# Altium PCB Powerre.PcbDoc
Units mm, origin at the board's own origin, x right, y up, seen from the top; angles counter-clockwise.
Board outline 75.82 x 74.68 mm, 2 copper layers (Top Layer, Bottom Layer); 2 components, 6 nets, 12 pads, 0 vias.
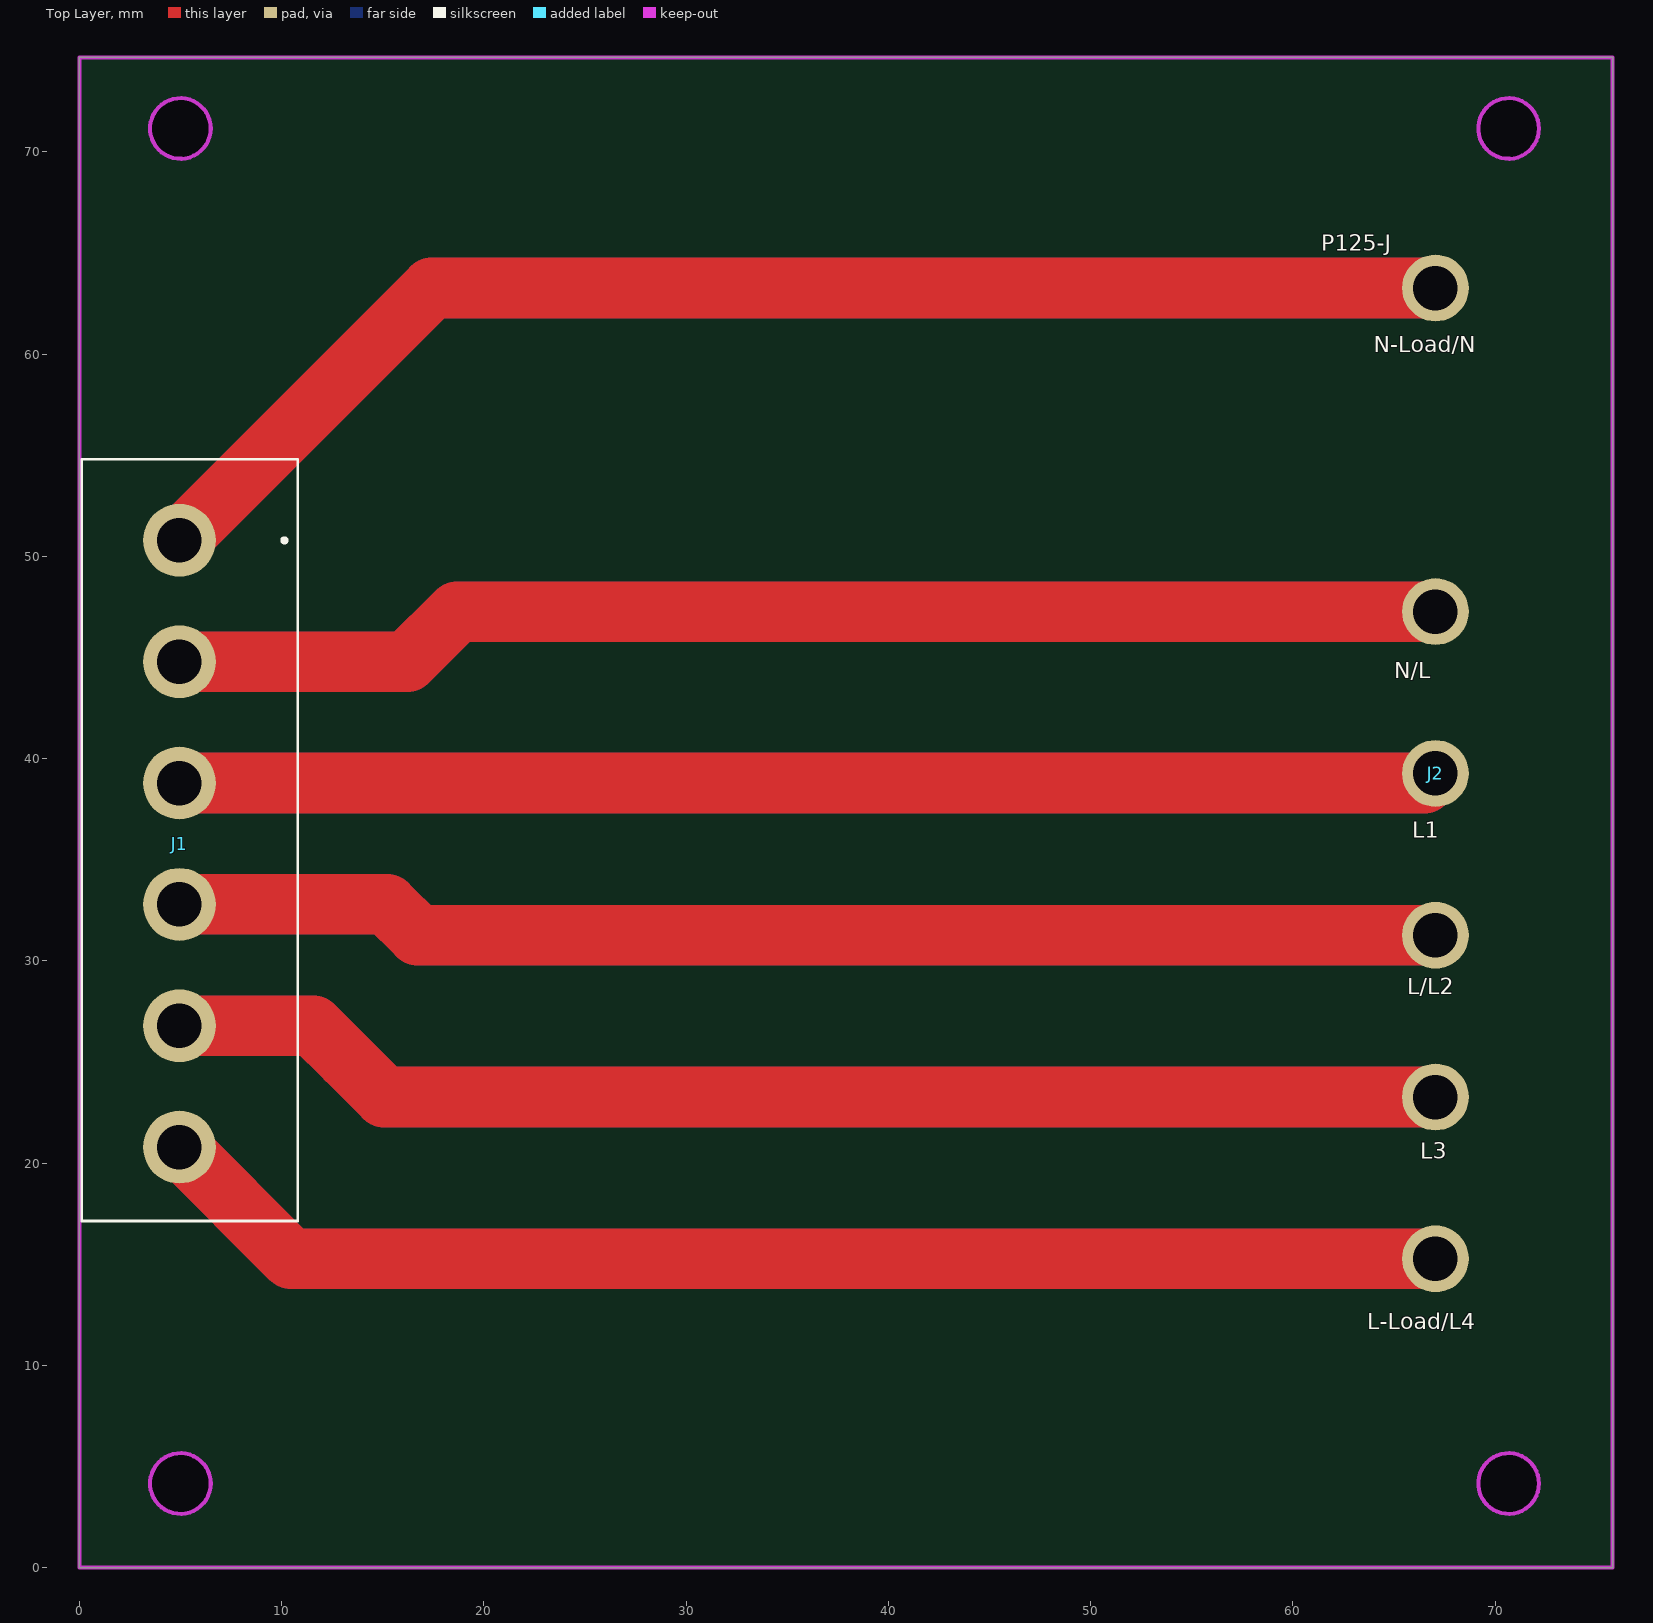
[diagram p0: Top Layer view]
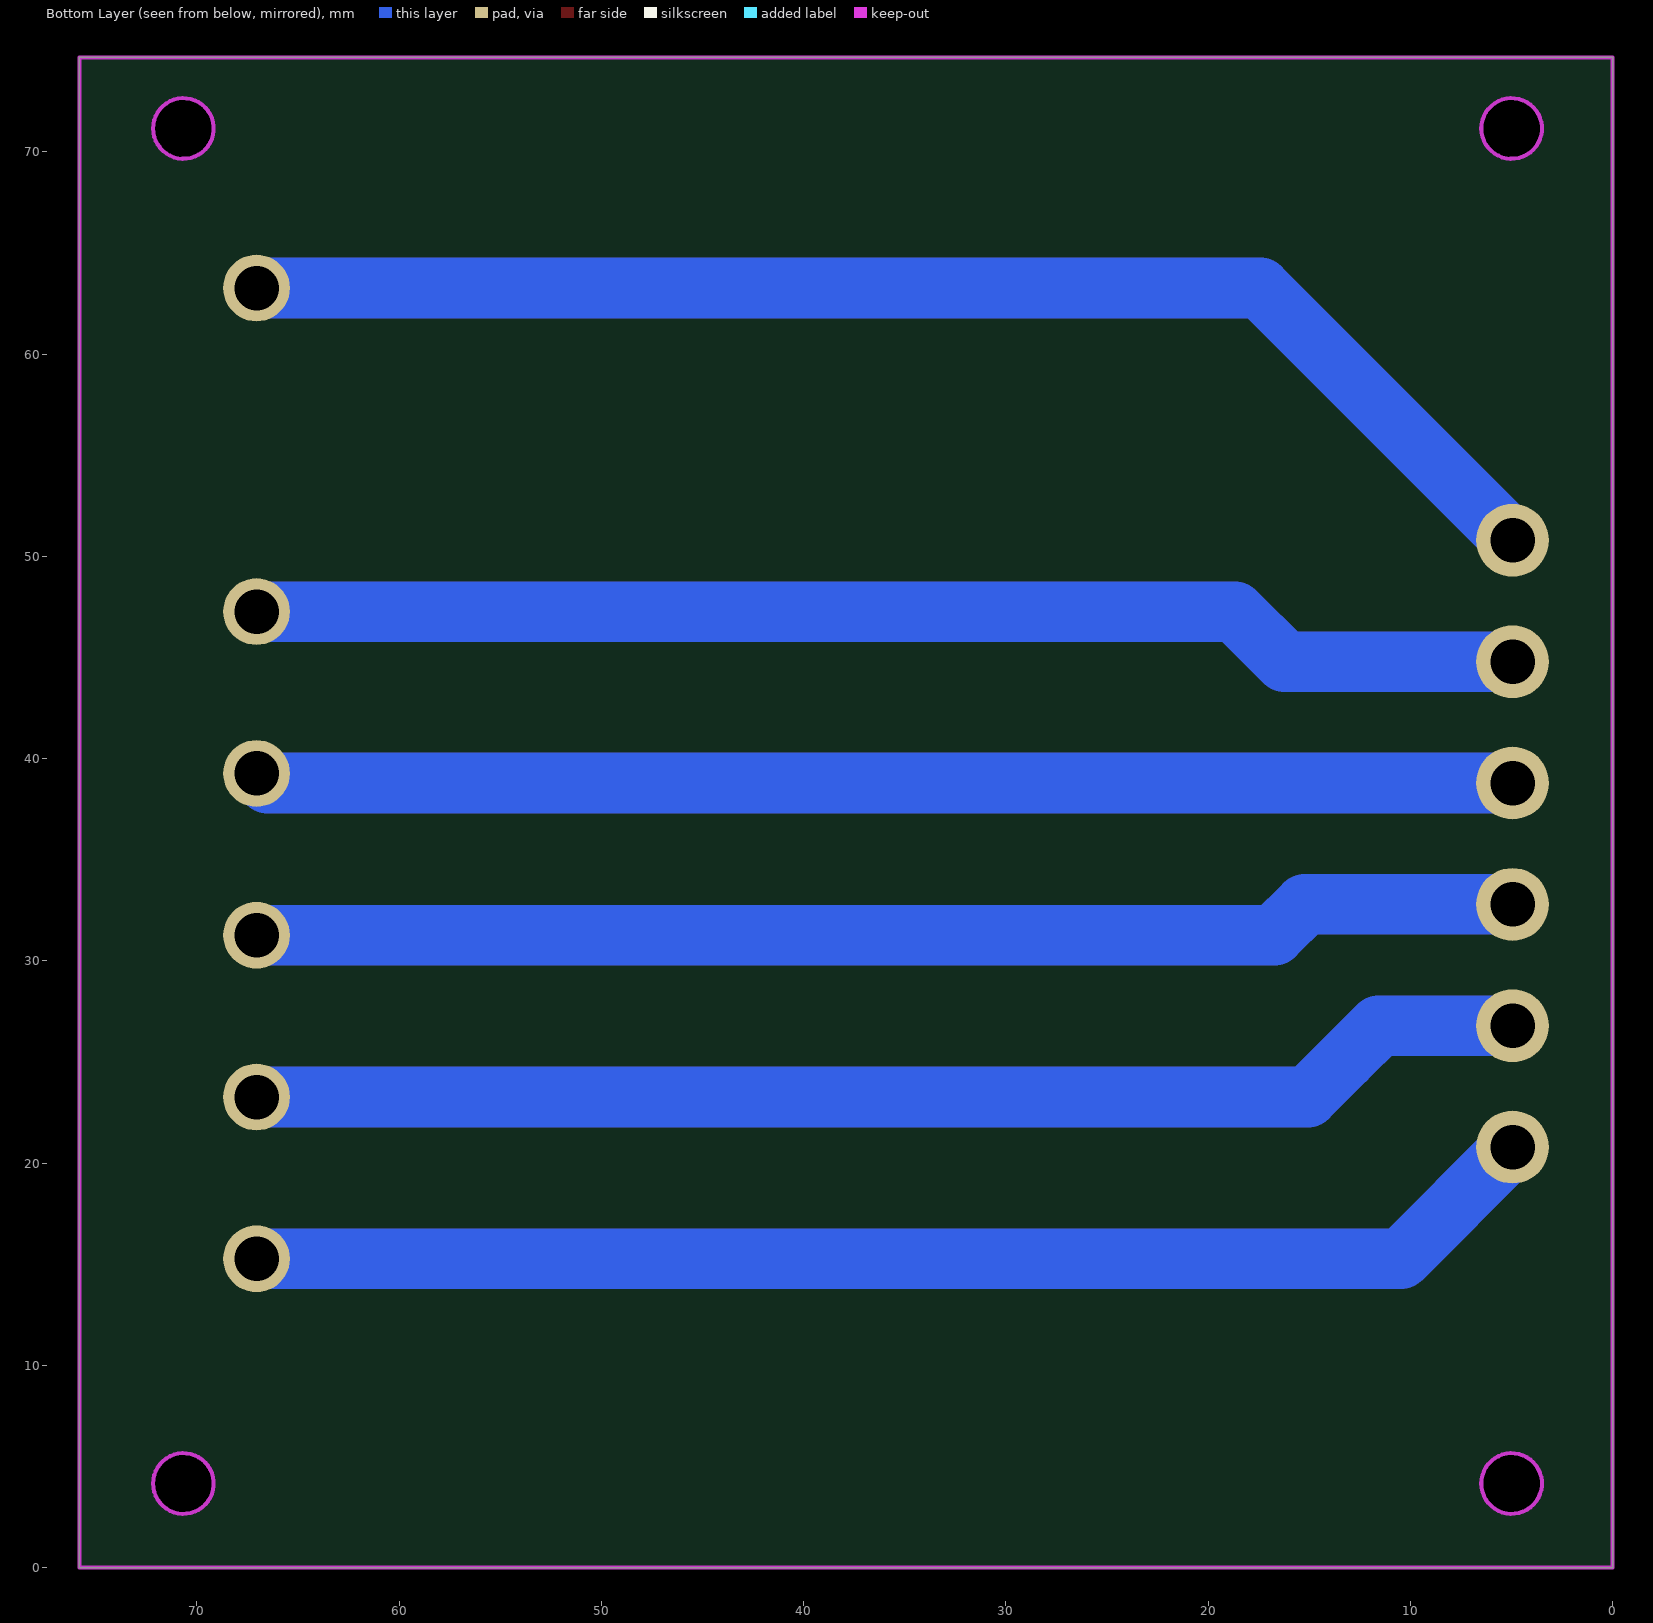
[diagram p1: Bottom Layer view, seen from below]

## Layer stack, top to bottom
Top Solder: solder mask 0.0102, Solder Resist, Dk 3.5
Top Layer: signal copper 0.0356
Dielectric 1: dielectric 0.32, FR-4, Dk 4.8
Bottom Layer: signal copper 0.0356
Bottom Solder: solder mask 0.0102, Solder Resist, Dk 3.5

## Board outline
0,0 0,74.676 75.819,74.676 75.819,0
cut-out: 70.671,69.657 ccw(c70.671,71.157) 72.171,71.157 ccw(c70.671,71.157) 70.671,72.657 ccw(c70.671,71.157) 69.171,71.157 ccw(c70.671,71.157)
cut-out: 5,69.657 ccw(c5,71.157) 6.5,71.157 ccw(c5,71.157) 5,72.657 ccw(c5,71.157) 3.5,71.157 ccw(c5,71.157)
cut-out: 70.671,2.657 ccw(c70.671,4.157) 72.171,4.157 ccw(c70.671,4.157) 70.671,5.657 ccw(c70.671,4.157) 69.171,4.157 ccw(c70.671,4.157)
cut-out: 6.556,4.191 cw(c5.056,4.191) 5.056,2.691 cw(c5.056,4.191) 3.556,4.191 cw(c5.056,4.191) 5.056,5.691 cw(c5.056,4.191)

## Design rules (kind name [scope] priority, off if disabled: settings)
Clearance [All] p1: gap=0.254 ignorepadtopadclearanceinfootprint=FALSE except(0: Arc-Hole Track-Hole SMDPad-Hole THPad-Hole Via-Hole Fill-Hole Poly-Hole Region-Hole Text-Hole)
PolygonConnect [All] p1: connectstyle=Relief reliefconductorwidth=0.254 reliefentries=4 polygonreliefangle="90 Angle" airgapwidth=0.254
RoutingVias [All] p1: holewidth=0.711 width=1.27 viastyle="Through Hole" minholewidth=0.711 minwidth=1.27 maxholewidth=0.711 maxwidth=1.27
SolderMaskExpansion [All] p1: expansion=0.102 istentingtop=FALSE
Width [All] p1: maxlimit=5 minlimit=0.254 preferedwidth=2
30 further rules are at their usual default settings.

## Components (designator, comment, footprint, x,y, rotation, side; value= is the part's Value field where it differs from the comment)
J1 "350543-1" TE_350543-1 4.953,50.791 r270 top
J2 "J4 AC" "J4 AC" 67.056,63.267 r0 top

## Footprints (in the part's own frame and the unit in brackets; to place one, negate y for a bottom-side part, rotate by r counter-clockwise, add the part's x,y. Pads: shape width x height; smd on the part's side, far side on the other; paste and mask are expansions set on the pad)
"J4 AC" [mm]
  round 3.3 hole 2.2: 1(0,-48) 2(0,-40) 3(0,-32) 4(0,-24) 5(0,-16) 6(0,0)
TE_350543-1 [mm]
  round 3.6 hole 2.2: 1(0,0) 2(6,0) 3(12,0) 4(18,0) 5(24,0) 6(30,0)
  silkscreen extent -4,-4.83 33.66,5.84

## Part data
J1: Package=None, Availability=Unavailable, MF="{'manufacturer': u'TE Connectivity'}", MP=350543-1, Price=None

## Nets (pads, with @x,y where several pads share a name; then routed paths per layer and width w, separated by ;. In a path a pad name is that pad's centre, name@x,y a point inside that pad or via, vN(x,y) a via of type N, cw(c..) or ccw(c..) an arc to the next point about the centre after c; other vN are vias at no path point)
NetJ1_1: J1.1 J2.6 | length 134.5
  Top Layer w3: J1.1 17.429,63.267 J2.6
  Bottom Layer w3: J1.1 17.429,63.267 J2.6
NetJ1_2: J1.2 J2.5 | length 126.3
  Top Layer w3: J1.2 16.216,44.791 18.692,47.267 J2.5
  Bottom Layer w3: J1.2 16.216,44.791 18.692,47.267 J2.5
NetJ1_3: J1.3 J2.4 | length 123.8
  Top Layer w3: J1.3 66.499,38.791 66.975,39.267 J2.4
  Bottom Layer w3: J1.3 J2.4@66.499,38.791
NetJ1_4: J1.4 J2.3 | length 125.5
  Top Layer w3: J1.4 15.215,32.791 16.739,31.267 J2.3
  Bottom Layer w3: J1.4 15.215,32.791 16.739,31.267 J2.3
NetJ1_5: J1.5 J2.2 | length 127.1
  Top Layer w3: J1.5 11.563,26.791 13.206,25.148 15.087,23.267 J2.2
  Bottom Layer w3: J1.5 11.563,26.791 13.206,25.148 15.087,23.267 J2.2
NetJ1_6: J1.6 J2.1 | length 128.8
  Top Layer w3: J1.6 10.477,15.267 J2.1
  Bottom Layer w3: J1.6 10.477,15.267 J2.1

## Keep-outs
Keep-Out Layer:
  circle w0.2: c70.671,71.157 r1.5
  circle w0.2: c5,71.157 r1.5
  circle w0.2: c5,4.157 r1.5
  circle w0.2: c70.671,4.157 r1.5
  lines w0.2: 0,0 0,74.676 75.819,74.676 75.819,0 0,0

## Silkscreen, mask and mechanical layers (free items; w line width, h text height)
Top Overlay:
  text "P125-J" at 61.412,65.105 h0.8
  text "N-Load/N" at 64.003,60.101 h0.8
  text "N/L" at 65.024,43.967 h0.8
  text "L1" at 65.913,36.093 h0.8
  text "L/L2" at 65.659,28.346 h0.8
  text "L3" at 66.294,20.218 h0.8
  text "L-Load/L4" at 63.678,11.786 h0.8